# Altium PCB board_Two.PcbDoc
Units mm, origin at the board's own origin, x right, y up, seen from the top; angles counter-clockwise.
Board outline 99.06 x 38.1 mm, 2 copper layers (Top Layer, Bottom Layer); 12 components, 10 nets, 51 pads, 8 vias.
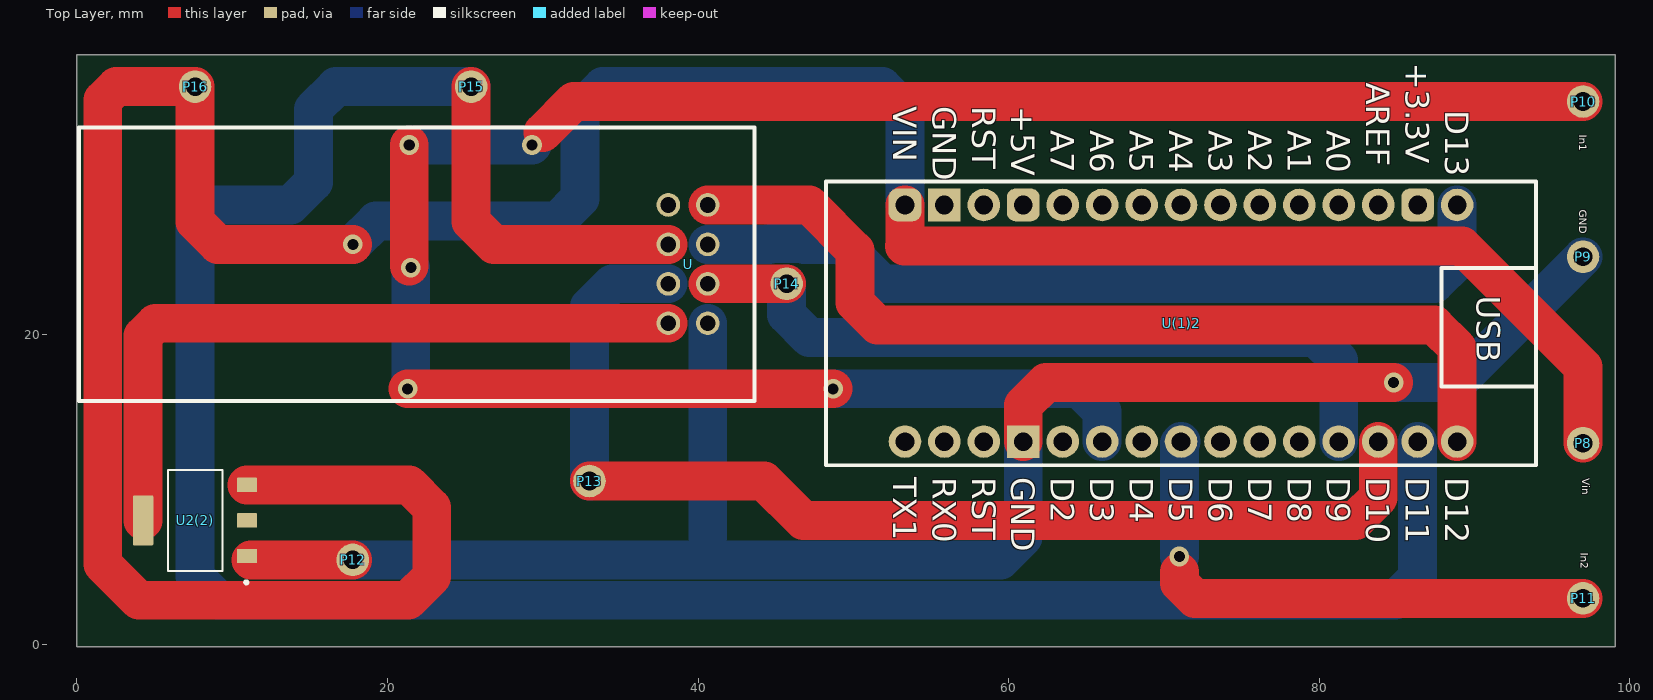
[diagram p0: Top Layer view]
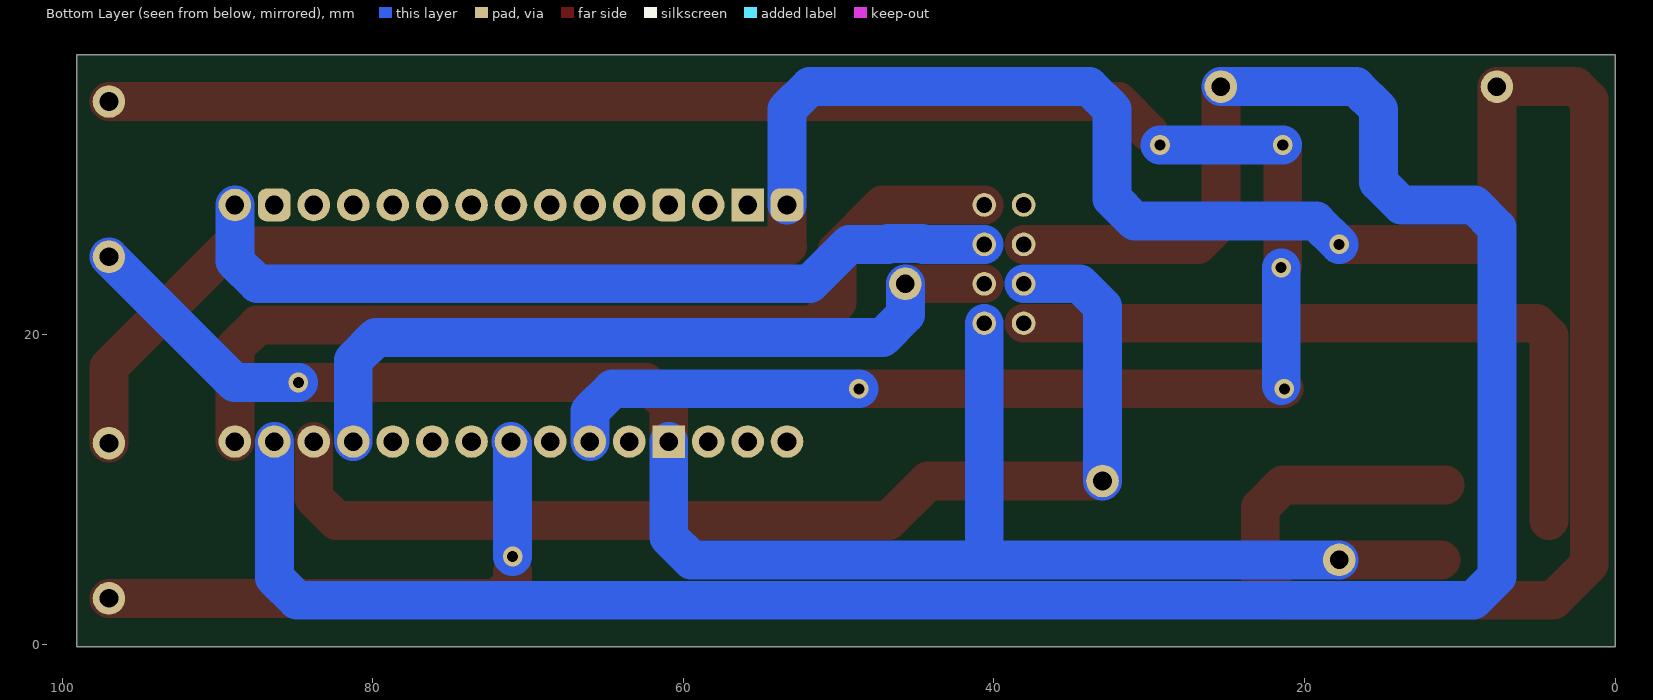
[diagram p1: Bottom Layer view, seen from below]

## Layer stack, top to bottom
Top Solder: solder mask 0.0102, Solder Resist, Dk 3.5
Top Layer: signal copper 0.0356
Dielectric 1: dielectric 0.32, FR-4, Dk 4.8
Bottom Layer: signal copper 0.0356
Bottom Solder: solder mask 0.0102, Solder Resist, Dk 3.5

## Board outline
0,-0.1 99.06,-0.1 99.06,38 0,38

## Design rules (kind name [scope] priority, off if disabled: settings)
AssemblyTestPointUsage [All] p1: isadvanced=TRUE
AssemblyTestpoint [All] p1: isadvanced=TRUE testpointundercomponent=TRUE minsize=1.016 maxsize=2.54 preferedsize=1.524 minholesize=0 maxholesize=1.016 preferedholesize=0.813 testpointgrid=0.025 usegrid=TRUE gridtolerance=0 allowsidetop=TRUE allowsidebottom=TRUE
Clearance Clearance_1 [OnMid vs OnMid] p1: gap=0 ignorepadtopadclearanceinfootprint=FALSE sourcerule=37 cellrowname=All cellrowtype=0 cellcolname=All cellcoltype=0 innerlayers=TRUE
Clearance Clearance_2 [(ExistsOnLayer('Top Layer') Or ExistsOnLayer('Bottom Layer')) vs (ExistsOnLayer('Top Layer') Or ExistsOnLayer('Bottom Layer'))] p2: gap=0 ignorepadtopadclearanceinfootprint=FALSE sourcerule=37 cellrowname=All cellrowtype=0 cellcolname=All cellcoltype=0 outerlayers=TRUE
Clearance [All] p3: gap=0.254 ignorepadtopadclearanceinfootprint=FALSE ismatrix=TRUE
ComponentClearance [All] p1: isadvanced=TRUE gap=0.254 collisioncheckmode=3 verticalgap=0.254 showdistances=FALSE
FabricationTestPointUsage [All] p1: isadvanced=TRUE valid=0 allowmultiple=FALSE
FabricationTestpoint [All] p1: isadvanced=TRUE side=3 testpointundercomponent=TRUE minsize=1.016 maxsize=2.54 preferedsize=1.524 minholesize=0 maxholesize=1.016 preferedholesize=0.813 testpointgrid=0.025 allowsidetop=TRUE allowsidebottom=TRUE usegrid=TRUE gridtolerance=0
FanoutControl Fanout_BGA [IsBGA] p1: isadvanced=TRUE bgadir=Out bgaviamode=Centered fanoutstyle=Auto fanoutdirection=Alternating viagrid=0.025 // Fanout_BGA (Default Rule)
FanoutControl Fanout_LCC [IsLCC] p2: isadvanced=TRUE bgadir=Out bgaviamode=Centered fanoutstyle=Auto fanoutdirection=Alternating viagrid=0.025 // Fanout_LCC (Default Rule)
FanoutControl Fanout_SOIC [IsSOIC] p3: isadvanced=TRUE bgadir=Out bgaviamode=Centered fanoutstyle=Auto fanoutdirection=Alternating viagrid=0.025 // Fanout_SOIC (Default Rule)
FanoutControl Fanout_Small [(CompPinCount < 5)] p4: isadvanced=TRUE bgadir=Out bgaviamode=Centered fanoutstyle=Auto fanoutdirection=OutThenIn viagrid=0.025 // Fanout_Small (Default Rule)
FanoutControl Fanout_Default [All] p5: isadvanced=TRUE bgadir=Out bgaviamode=Centered fanoutstyle=Auto fanoutdirection=Alternating viagrid=0.025 // Fanout_Default (Default Rule)
Height [All] p1: isadvanced=TRUE minheight=0 maxheight=25.4 prefheight=12.7
HoleSize [All] p1: isadvanced=TRUE absolutevalues=TRUE maxlimit=2.54 minlimit=0.025 maxpercent=80.000 minpercent=20.000
HoleToHoleClearance [All] p1: isadvanced=TRUE gap=0.254 allowstackedmicrovias=TRUE
LayerPairs [All] p1: isadvanced=TRUE enforce=TRUE
MinimumSolderMaskSliver [All] p1: isadvanced=TRUE minsoldermaskwidth=0.254
NetAntennae [All] p1: isadvanced=TRUE netantennaetolerance=0
PasteMaskExpansion [All] p1: isadvanced=TRUE expansion=0
PlaneClearance [All] p1: isadvanced=TRUE clearance=0.508
PlaneConnect [All] p1: isadvanced=TRUE planeconnectstyle=Relief reliefexpansion=0.508 reliefentries=4 reliefconductorwidth=0.254 reliefairgap=0.254
PolygonConnect [All] p1: connectstyle=Relief reliefconductorwidth=0.254 reliefentries=4 polygonreliefangle="90 Angle" airgapwidth=0.254
RoutingCorners [All] p1: isadvanced=TRUE cornerstyle=45-Degree minsetback=2.54 maxsetback=2.54
RoutingPriority [All] p1: isadvanced=TRUE routingpriority=0
RoutingVias [All] p1: holewidth=0.711 width=1.27 viastyle="Through Hole" minholewidth=0.711 minwidth=1.27 maxholewidth=0.711 maxwidth=1.27
ShortCircuit [All] p1: isadvanced=TRUE allowed=FALSE
SilkToSilkClearance [All] p1: isadvanced=TRUE silktosilkclearance=0.254
SilkToSolderMaskClearance [IsPad] p1: isadvanced=TRUE minsilkscreentomaskgap=0.254 clearancetoexposedcopper=TRUE
SolderMaskExpansion [All] p1: isadvanced=TRUE expansion=0.102 istentingtop=FALSE
UnRoutedNet [All] p1: isadvanced=TRUE
UnpouredPolygon [All] p1: isadvanced=TRUE
Width MaxMinWidth_1 [All] p1: isadvanced=TRUE maxlimit=2.5 minlimit=2.5 preferedwidth=2.5 minimp=50.000000 maximp=50.000000 favimp=50.000000
Width [All] p2 off: maxlimit=0.254 minlimit=0.254 preferedwidth=0.254
4 further rules are at their usual default settings.

## Classes and differential pairs
component class board_Two: P8 P9 P10 P11 U U2(2)

## Components (designator, comment, footprint, x,y, rotation, side; value= is the part's Value field where it differs from the comment)
P8 "PIN_1" PCB_Pin_1 97,13 r0 top
P9 "PIN_1" PCB_Pin_1 97,25 r0 top
P10 "PIN_1" PCB_Pin_1 97,35 r0 top
P11 "PIN_1" PCB_Pin_1 97,3 r0 top
P12 "PIN_1" PCB_Pin_1 17.767,5.48 r0 top
P13 "PIN_1" PCB_Pin_1 33.007,10.56 r0 top
P14 "PIN_1" PCB_Pin_1 45.707,23.26 r0 top
P15 "PIN_1" PCB_Pin_1 25.387,35.96 r0 top
P16 "PIN_1" PCB_Pin_1 7.607,35.96 r0 top
U "NRF24L01P-MODULE-PCB" XCVR_NRF24L01P-MODULE-PCB 39.357,24.53 r180 top
U2(2) "AMS1117-5.0" SOT229P700X180-4N 7.607,8.02 r90 top
U(1)2 "ATMega328p" PCB_ATMega328p 50.787,30.88 r270 top

## Footprints (in the part's own frame and the unit in brackets; to place one, negate y for a bottom-side part, rotate by r counter-clockwise, add the part's x,y. Pads: shape width x height; smd on the part's side, far side on the other; paste and mask are expansions set on the pad)
PCB_ATMega328p [mm] "Arduino Nano"
  rrect50% 2.1x2.1 hole 1.2: 0(2.54,2.54) 3(2.54,10.16) 13(2.54,35.56)
  rect 2.1x2.1 hole 1.2: 1(2.54,5.08) 26(17.78,10.16)
  round 2.1 hole 1.2: 2(2.54,7.62) 4(2.54,12.7) 5(2.54,15.24) 6(2.54,17.78) 7(2.54,20.32) 8(2.54,22.86) 9(2.54,25.4) 10(2.54,27.94) 11(2.54,30.48) 12(2.54,33.02) 14(2.54,38.1) 15(17.78,38.1) 16(17.78,35.56) 17(17.78,33.02) 18(17.78,30.48) 19(17.78,27.94) 20(17.78,25.4) 21(17.78,22.86) 22(17.78,20.32) 23(17.78,17.78) 24(17.78,15.24) 25(17.78,12.7) 27(17.78,7.62) 28(17.78,5.08) 29(17.78,2.54)
  silkscreen extent 1.02,-2.54 19.3,43.18
PCB_Pin_1 [mm]
  round 2.1 hole 1.2: 0(0,0)
  body extent -1,-1 1,1, height 4.55
SOT229P700X180-4N [mm]
  rrect15% 0.93x1.31 smd: 1(-2.29,-3.345) 3(2.29,-3.345) 4(0,-3.345)
  rrect15% 3.24x1.31 smd: 2(0,3.345)
  silkscreen extent -4.09,-3.4 3.25,1.75, body extent -3.25,-3.5 3.25,3.5, height 1.8
XCVR_NRF24L01P-MODULE-PCB [mil]
  round 60 hole 40: 1(-50,150) 2(50,150) 3(-50,50) 4(50,50) 5(-50,-50) 6(50,-50) 7(-50,-150) 8(50,-150)
  silkscreen extent -168,-347 1544,347

## Part data
U: "- Transceiver For Use With nRF24L01+", Package=None, Availability=Bad, MF="Nordic Semiconductor", Mouser-Purchase-URL=https://snapeda.com/shop?store=Mouser&id=230534, MP=NRF24L01P-MODULE-PCB, Price=None, SnapEDA_Link=https://www.snapeda.com/parts/NRF24L01P-MODULE-PCB/Nordic%20Semiconductor%20ASA/view-part/230534/?ref=snap
U2(2): "1A LOW DROPOUT VOLTAGE REGULATOR", Package="SOT-223 Seeed Technology", Availability="Not in stock", Check_prices=https://www.snapeda.com/parts/AMS1117-5.0/ams/view-part/?ref=eda, MF=ams, MP=AMS1117-5.0, Price=None, SnapEDA_Link=https://www.snapeda.com/parts/AMS1117-5.0/ams/view-part/?ref=snap
U(1)2: library part "Arduino Nano", "DCCduino Nano CH340 - аналог Arduino Nano v3.0 TYPE C"

## Via types
v1: diameter 1.27, hole 0.711, Top Layer to Bottom Layer, 8 vias

## Nets (pads, with @x,y where several pads share a name; then routed paths per layer and width w, separated by ;. In a path a pad name is that pad's centre, name@x,y a point inside that pad or via, vN(x,y) a via of type N, cw(c..) or ccw(c..) an arc to the next point about the centre after c; other vN are vias at no path point)
NetP8_0: P8.0 P16.0 U2(2).3 U(1)2.0 | length 199.7
  Top Layer w2.5: 10.952,10.31 21.383,10.31 22.847,8.846 22.847,4.404 21.323,2.88 3.992,2.88 1.662,5.209 1.662,35.095 2.527,35.96 P16.0 7.607,27.264 9.072,25.8 v1(17.767,25.8) ; 53.3,25.7 89.2,25.7 97,17.9 P8.0 ; 53.327,25.727 53.327,28.34
  Bottom Layer w2.5: v1(17.767,25.8) 19.267,27.3 30.936,27.3 32.4,28.764 32.4,34.496 33.864,35.96 51.863,35.96 53.327,34.496 53.327,28.34
NetP9_0: P9.0 P12.0 U2(2).1 U(1)2.26 U.1 | length 112.6
  Top Layer w2.5: 11.202,5.48 P12.0 ; 60.947,13.1 60.947,15.436 62.412,16.9 v1(84.8,16.9)
  Bottom Layer w2.5: P12.0 59.483,5.48 60.947,6.944 60.947,13.1 ; 40.627,6.944 U.1 ; v1(84.8,16.9) 88.9,16.9 P9.0
NetP10_0: P10.0 U(1)2.24 | length 138.4
  Top Layer w2.5: v1(21.3,16.5) 27.6,16.5 v1(48.7,16.5) ; v1@21.4,24.4 v1(21.4,32.2) ; 30,33 32,35 P10.0
  Bottom Layer w2.5: v1(21.4,32.2) v1(29.3,32.2) ; v1@21.5,16.7 v1(21.5,24.3) ; v1(48.7,16.5) 64.563,16.5 66.027,15.036 66.027,13.1
NetP11_0: P11.0 U(1)2.22 | length 34.6
  Top Layer w2.5: 71,4.7 71,4 72,3 P11.0
  Bottom Layer w2.5: v1(71,5.7) 71,12.993 71.107,13.1
NetP13_0: P13.0 U(1)2.17 U.4 | length 73
  Top Layer w2.5: P13.0 44.243,10.56 46.783,8.02 82.343,8.02 83.807,9.484 83.807,13.1
  Bottom Layer w2.5: P13.0 33.007,21.796 34.472,23.26 U.4
NetP14_0: P14.0 U(1)2.18 U.3 | length 49.1
  Top Layer w2.5: U.3 P14.0
  Bottom Layer w2.5: P14.0 45.707,21.264 47.172,19.8 79.803,19.8 81.267,18.336 81.267,13.1
NetP15_0: P15.0 U(1)2.16 U.6 | length 157.5
  Top Layer w2.5: P15.0 25.387,27.264 26.852,25.8 U.6
  Bottom Layer w2.5: P15.0 16.692,35.96 15.227,34.496 15.227,29.804 13.763,28.34 9.072,28.34 7.607,26.876 7.607,4.404 9.132,2.88 84.883,2.88 86.347,4.344 86.347,13.1
NetU2(2)_2: U2(2).2 U.2 | length 46.1
  Top Layer w2.5: 4.262,8.02 4.262,19.915 5.067,20.72 U.2
NetU(1)2_14: U(1)2.14 U.5 | length 53.6
  Bottom Layer w2.5: U.5 44.57,25.8 44.63,25.86 46.784,25.86 46.844,25.8 49.323,25.8 51.863,23.26 87.423,23.26 88.887,24.724 88.887,28.34
NetU(1)2_15: U(1)2.15 U.7 | length 60.1
  Top Layer w2.5: U.7 47.16,28.34 50.1,25.4 50.1,22.064 51.564,20.6 87.423,20.6 88.887,19.136 88.887,13.1
pads on no net: U2(2).4 U(1)2.1 U(1)2.2 U(1)2.3 U(1)2.4 U(1)2.5 U(1)2.6 U(1)2.7 U(1)2.8 U(1)2.9 U(1)2.10 U(1)2.11 U(1)2.12 U(1)2.13 U(1)2.19 U(1)2.20 U(1)2.21 U(1)2.23 U(1)2.25 U(1)2.27 U(1)2.28 U(1)2.29 U.8

## Silkscreen, mask and mechanical layers (free items; w line width, h text height)
Top Overlay:
  text "In1" at 96.754,32.846 h0.5 r270
  text "GND" at 96.754,28.046 h0.5 r270
  text "Vin" at 96.954,10.746 h0.5 r270
  text "In2" at 96.854,5.946 h0.5 r270

## Text inside footprints (layer, text, board x,y; h text height)
U(1)2: Top Overlay "D13" at 88.125,34.436 h1.52 r270; Top Overlay "+3.3V" at 85.585,37.484 h1.52 r270; Top Overlay "AREF" at 83.045,36.214 h1.52 r270; Top Overlay "A0" at 80.505,33.166 h1.52 r270; Top Overlay "A1" at 77.965,33.166 h1.52 r270; Top Overlay "A2" at 75.425,33.166 h1.52 r270; Top Overlay "A3" at 72.885,33.166 h1.52 r270; Top Overlay "A4" at 70.345,33.166 h1.52 r270; Top Overlay "A5" at 67.805,33.166 h1.52 r270; Top Overlay "A6" at 65.265,33.166 h1.52 r270; Top Overlay "A7" at 62.725,33.166 h1.52 r270; Top Overlay "+5V" at 60.185,34.69 h1.52 r270; Top Overlay "RST" at 57.645,34.69 h1.52 r270; Top Overlay "GND" at 55.105,34.69 h1.52 r270; Top Overlay "VIN" at 52.565,34.69 h1.52 r270; Top Overlay "D12" at 88.125,10.814 h1.52 r270; Top Overlay "D11" at 85.585,10.814 h1.52 r270; Top Overlay "D10" at 83.045,10.814 h1.52 r270; Top Overlay "D9" at 80.505,10.814 h1.52 r270; Top Overlay "D8" at 77.965,10.814 h1.52 r270; Top Overlay "D7" at 75.425,10.814 h1.52 r270; Top Overlay "D6" at 72.885,10.814 h1.52 r270; Top Overlay "D5" at 70.345,10.814 h1.52 r270; Top Overlay "D4" at 67.805,10.814 h1.52 r270; Top Overlay "D3" at 65.265,10.814 h1.52 r270; Top Overlay "D2" at 62.725,10.814 h1.52 r270; Top Overlay "GND" at 60.185,10.814 h1.52 r270; Top Overlay "RST" at 57.645,10.814 h1.52 r270; Top Overlay "RX0" at 55.105,10.814 h1.52 r270; Top Overlay "TX1" at 52.565,10.814 h1.52 r270; Top Overlay "USB" at 90.157,22.498 h1.52 r270